# Altium PCB Batarey.PcbDoc
Units mm, origin at the board's own origin, x right, y up, seen from the top; angles counter-clockwise.
Board outline 285.25 x 105.25 mm, 2 copper layers (Top Layer, Bottom Layer); 38 components, 31 nets, 125 pads, 0 vias.
Unrouted connection lines stored in the file: 60.
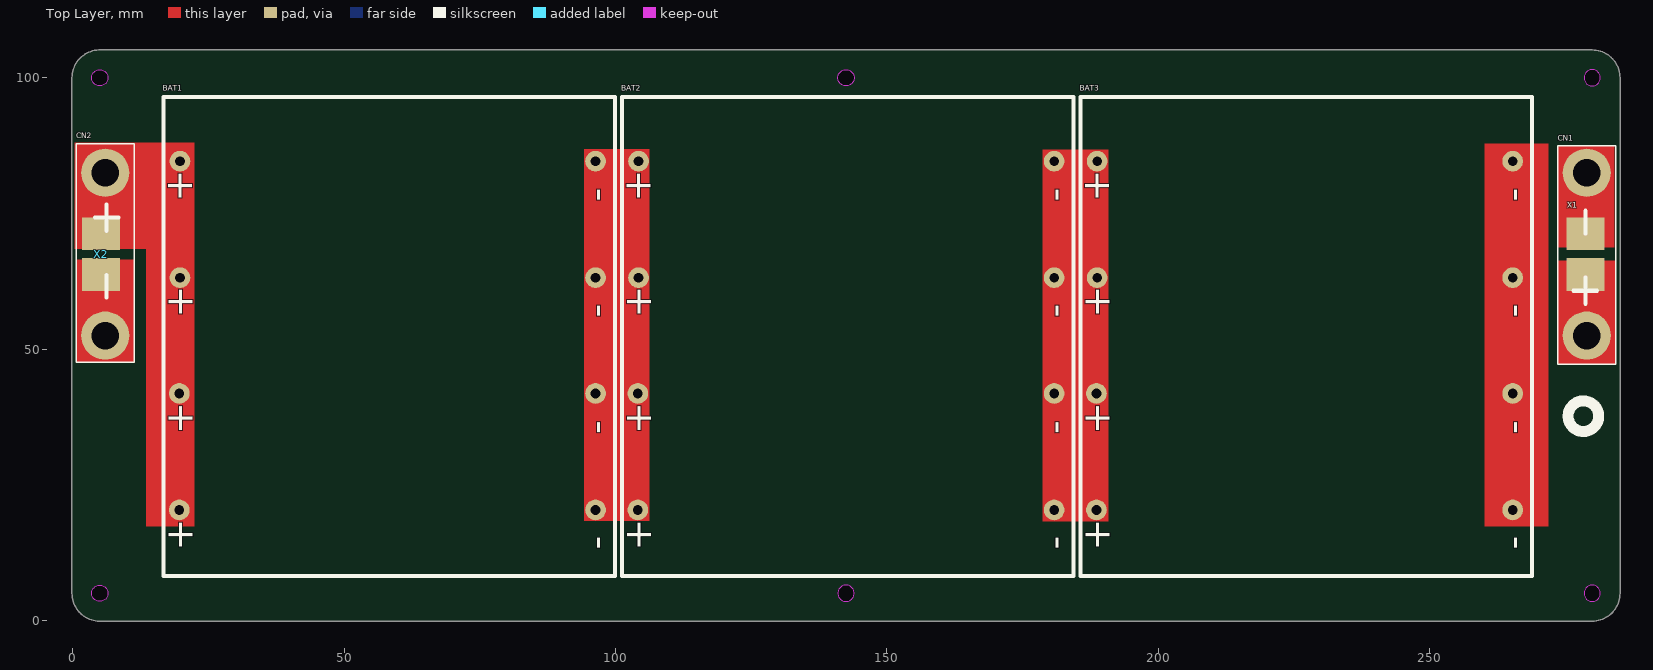
[diagram p0: Top Layer view]
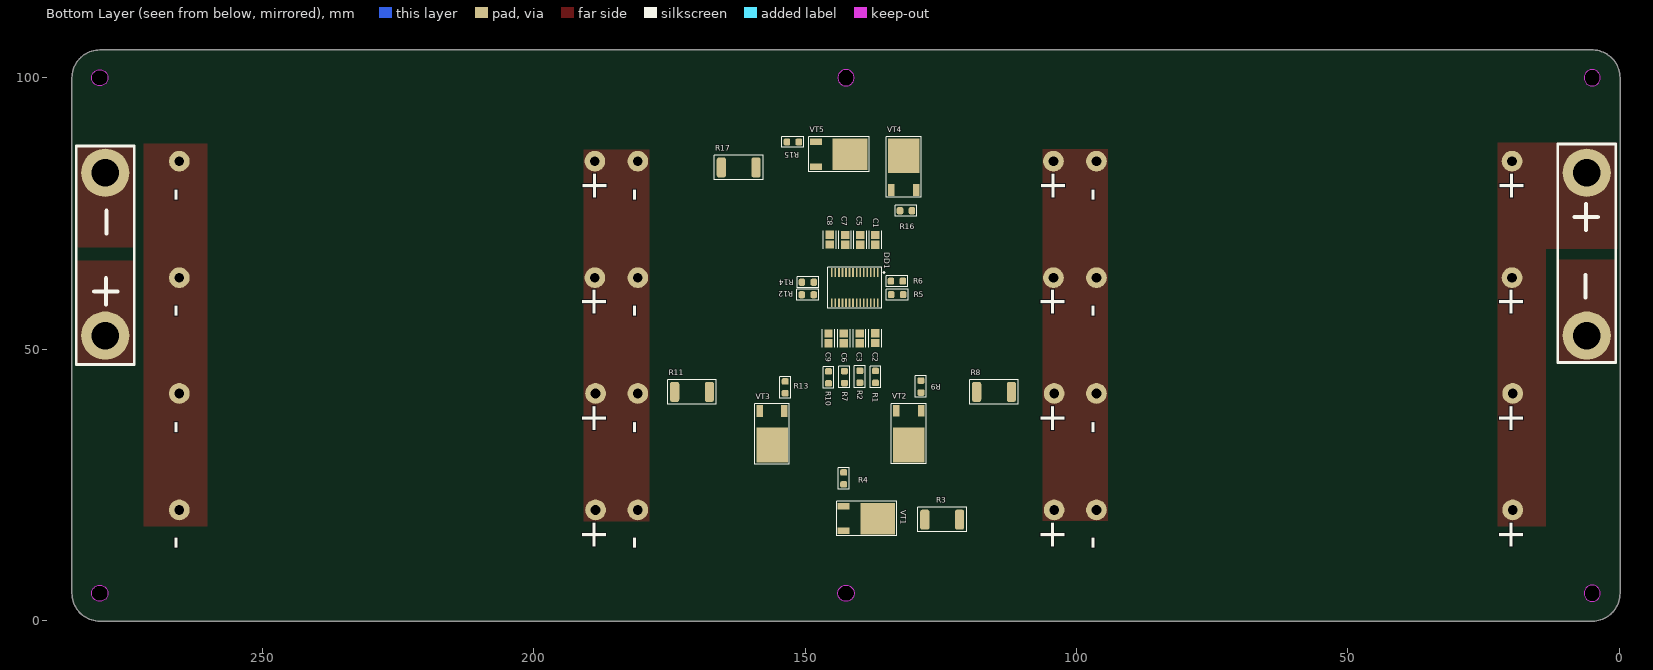
[diagram p1: Bottom Layer view, seen from below]

## Layer stack, top to bottom
Top Solder: solder mask 0.0102, Solder Resist, Dk 3.5
Top Layer: signal copper 0.0356
Dielectric 1: dielectric 0.32, FR-4, Dk 4.8
Bottom Layer: signal copper 0.0356
Bottom Solder: solder mask 0.0102, Solder Resist, Dk 3.5

## Board outline
-0.127,5 -0.127,5.001 -0.127,100 cw(c5,100) 4.822,105.124 cw(c4.85,105) 4.85,105.127 280,105.127 cw(c280,105) 280.003,105.127 cw(c280,100) 285.127,100 285.127,5 cw(c280,5) 280.03,-0.127 cw(c280.025,-0.001) 280.025,-0.127 4.95,-0.127 cw(c4.95,0) 4.94,-0.127 cw(c5,5)
cut-out: 278.5,5 ccw(c280,5) 280,3.5 ccw(c280,5) 281.5,5 ccw(c280,5) 280,6.5 ccw(c280,5)
cut-out: 278.5,100 ccw(c280,100) 280,98.5 ccw(c280,100) 281.5,100 ccw(c280,100) 280,101.5 ccw(c280,100)
cut-out: 142.5,98.5 cw(c142.5,100) 141,100 cw(c142.5,100) 142.5,101.5 cw(c142.5,100) 144,100 cw(c142.5,100)
cut-out: 141,5 ccw(c142.5,5) 142.5,3.5 ccw(c142.5,5) 144,5 ccw(c142.5,5) 142.5,6.5 ccw(c142.5,5)
cut-out: 5,3.5 cw(c5,5) 3.5,5 cw(c5,5) 5,6.5 cw(c5,5) 6.5,5 cw(c5,5)
cut-out: 5,98.5 cw(c5,100) 3.5,100 cw(c5,100) 5,101.5 cw(c5,100) 6.5,100 cw(c5,100)

## Design rules (kind name [scope] priority, off if disabled: settings)
Clearance [All] p1: gap=0.254 ignorepadtopadclearanceinfootprint=TRUE
ComponentClearance [All] p1: gap=0.254 collisioncheckmode=3 verticalgap=-10 showdistances=FALSE
PlaneClearance PlaneClearance_1 [All] p1: clearance=1
PolygonConnect PolygonConnect_1 [All] p1: connectstyle=Direct reliefconductorwidth=0.254 reliefentries=4 polygonreliefangle="90 Angle" airgapwidth=0.254
RoutingVias [All] p1: holewidth=0.4 width=0.8 viastyle="Through Hole" minholewidth=0.4 minwidth=0.8 maxholewidth=4 maxwidth=6
SolderMaskExpansion [All] p1: expansion=0.102 istentingtop=FALSE
Width [All] p1: maxlimit=12.7 minlimit=0.254 preferedwidth=1 bottomlayer_prefwidth=0.508 minimp=50.000000 maximp=50.000000 favimp=50.000000
28 further rules are at their usual default settings.

## Components (designator, comment, footprint, x,y, rotation, side; value= is the part's Value field where it differs from the comment)
BAT1 "21700_Bat" 21700_BAT 58,52.5 r90 top locked
BAT2 "21700_Bat" 21700_BAT 142.5,52.5 r90 top locked
BAT3 "21700_Bat" 21700_BAT 227,52.5 r90 top locked
C1 "C0805C224K5RACTU" FP-C0805C-DN-IPC_A 137.075,70.125 r270 bottom value="0.22 μF"
C2 "C0805C224K5RACTU" FP-C0805C-DN-IPC_A 137.1,52.025 r270 bottom value="0.22 μF"
C3 "C0805C224K5RACTU" FP-C0805C-DN-IPC_A 140,52 r270 bottom value="0.22 μF"
C5 "C0805C224K5RACTU" FP-C0805C-DN-IPC_A 139.875,70.125 r270 bottom value="0.22 μF"
C6 "C0805C224K5RACTU" FP-C0805C-DN-IPC_A 142.875,51.975 r270 bottom value="0.22 μF"
C7 "C0805C224K5RACTU" FP-C0805C-DN-IPC_A 142.675,70.15 r270 bottom value="0.22 μF"
C8 "C0805C224K5RACTU" FP-C0805C-DN-IPC_A 145.5,70.175 r270 bottom value="0.22 μF"
C9 "C0805C224K5RACTU" FP-C0805C-DN-IPC_A 145.725,52 r270 bottom value="0.22 μF"
CN1 "BAT_CON" Batarey_connector 279,67.5 r90 top locked
CN2 "BAT_CON" Batarey_connector 6,67.5 r270 top locked
DD1 "BM3451" TSSOP-28 140.875,61.325 r270 bottom
R1 "*" R-0805 137.075,44.875 r270 bottom
R2 "*" R-0805 139.95,44.9 r270 bottom
R3 "*" R-2512 124.775,18.575 r180 bottom
R4 "*" R-0805 142.925,26.175 r270 bottom
R5 "*" R-0805 133.075,60.05 r180 bottom
R6 "*" R-0805 133.125,62.525 r180 bottom
R7 "*" R-0805 142.8,44.85 r270 bottom
R8 "*" R-2512 115.225,42.125 r180 bottom
R9 "*" R-0805 128.7,43.1 r270 bottom
R10 "*" R-0805 145.725,44.8 r270 bottom
R11 "*" R-2512 170.875,42.125 r0 bottom
R12 "*" R-0805 149.55,60.025 r180 bottom
R13 "*" R-0805 153.7,42.95 r270 bottom
R14 "*" R-0805 149.525,62.325 r0 bottom
R15 "*" R-0805 152.3,88.175 r0 bottom
R16 "*" R-0805 131.45,75.5 r180 bottom
R17 "*" R-2512 162.275,83.475 r0 bottom
VT1 "MOSFET-N-GDS" TO-220-5 138.725,18.775 r270 bottom
VT2 "MOSFET-N-GDS" TO-220-5 130.925,34.45 r0 bottom
VT3 "MOSFET-N-GDS" TO-220-5 156.125,34.425 r0 bottom
VT4 "MOSFET-N-GDS" TO-220-5 131.875,83.525 r180 bottom
VT5 "MOSFET-N-GDS" TO-220-5 143.85,85.925 r270 bottom
X1 "XT60-F" "XT60-F AMASS" 279,67.5 r270 top locked
X2 "XT60-F" "XT60-F AMASS" 5,67.5 r90 top locked

## Footprints (in the part's own frame and the unit in brackets; to place one, negate y for a bottom-side part, rotate by r counter-clockwise, add the part's x,y. Pads: shape width x height; smd on the part's side, far side on the other; paste and mask are expansions set on the pad)
21700_BAT [mil]
  round 150 hole 70: 1(-1265,1510) 2(-1265,-1510) 3(-420,1510) 4(-420,-1510) 5(420,1505) 6(420,-1510) 7(1265,1505) 8(1265,-1510)
  silkscreen extent -1745,-1650 1730,1625, body extent -1732,-1634 1732,1634, height 858
Batarey_connector [mm]
  round 8.89 hole 5.08: 1(-15,0) 2(15,0)
  silkscreen extent -20.32,-5.33 19.94,5.33
FP-C0805C-DN-IPC_A [mm]
  rect 1.505x1.556 smd paste+0 mask+0: 1(-0.901,0) 2(0.901,0)
  silkscreen extent -1.65,-1.18 1.65,1.18, body extent -1,-0.63 1,0.63, height 0.88
R-0805 [mm] "Chip Resistor, 2-Leads, Body 2,00x1,25mm, IPC Medium Density"
  rrect50% 1.2x1.3 smd: 1(-1.1,0) 2(1.1,0)
  silkscreen extent -2,-1 2,1, body extent -1,-0.62 1,0.63, height 0.6
R-2512 [mm]
  rrect50% 1.7x3.7 smd: 1(-3.2,0) 2(3.2,0)
  silkscreen extent -4.5,-2.25 4.5,2.25, body extent -3.16,-1.6 3.16,1.6, height 0.62
TO-220-5 [mm]
  rect 1.2x2.2 smd: 1(-2.28,-4.2) 3(2.28,-4.2)
  rect 5.8x6.4 smd: 2(0,2.1)
  silkscreen extent -3.2,-5.5 3.2,5.6, body extent -3.29,-4.77 3.29,4.93, height 2.3
TSSOP-28 [mm]
  rect 1.6x0.3 smd: 1(-2.8,4.225) 2(-2.8,3.575) 3(-2.8,2.925) 4(-2.8,2.275) 5(-2.8,1.625) 6(-2.8,0.975) 7(-2.8,0.325) 8(-2.8,-0.325) 9(-2.8,-0.975) 10(-2.8,-1.625) 11(-2.8,-2.275) 12(-2.8,-2.925) 13(-2.8,-3.575) 14(-2.8,-4.225) 15(2.8,-4.225) 16(2.8,-3.575) 17(2.8,-2.925) 18(2.8,-2.275) 19(2.8,-1.625) 20(2.8,-0.975) 21(2.8,-0.325) 22(2.8,0.325) 23(2.8,0.975) 24(2.8,1.625) 25(2.8,2.275) 26(2.8,2.925) 27(2.8,3.575) 28(2.8,4.225)
  silkscreen extent -3.8,-4.95 3.8,5.49, body extent -3.2,-4.85 3.2,4.85, height 1.17
"XT60-F AMASS" [mm] "Вилка; питания DC; XT60; \"мама\"; PIN: 2; на провод; под пайку; 30А"
  rect 6x7 smd: 1(-3.75,-0.25) 2(3.75,-0.25)
  body extent -7.75,-0.75 7.75,20.15, height 6.25

## Part data
C1 C2 C3 C5 C6 C7 C8 C9: library part CMP-1036-04552-2, "CAP CER 0.22UF 50V X7R 0805", Capacitance="0.22 μF", Manufacturer=KEMET, Package=C0805C-DN, Temperature="-55°C to +125°C", Temperature Characteristic=X7R, Temperature Coefficient=30ppm/°C, Temperature Range High=+125°C, Temperature Range Low=-55°C, Tolerance=0.1, Voltage Rating="50 V", Automotive=No, Category=Cap, ComponentLink2Description=Datasheet, ComponentLink2URL=https://content.kemet.com/datasheets/KEM_C1003_C0G_SMD.pdf, Device Class L1="Passive Components", Device Class L2=Capacitors, Device Class L3="Ceramic Capacitors", Digikey Description="CAP CER 0.22UF 50V X7R 0805", Height=0.88mm, Ipc Land Pattern Name=CAPC200125X78, Lead Free=Yes, Manufacturer Part Number=C0805C224K5RACTU, Material=Ceramic, Mouser Description="CAP CER 0.22UF 50V X7R 0805", Octopart=https://octopart.com/c0805c224k5ractu-kemet-144670, RoHS=TRUE
CN1 CN2: "Batarey_connection"
R1 R2 R4 R5 R6 R7 R9 R10 R12 R13 R14 R15 R16: library part R0805, "Резистор SMD", Package=R-0805, Tolerance=5%, ComponentDescription="Резистор SMD, R-0805, *Ом, 5%", ComponentType="Резистор SMD"
R3 R8 R11 R17: library part R2512, "Резистор SMD", Package=R-2512, Tolerance=5%, ComponentDescription="Резистор SMD, R-2512, *Ом, 5%", ComponentType="Резистор SMD"
X1 X2: "Разъем", ComponentDescription="Разъём, XT60-F", ComponentTypе=Разъём

## Nets (pads, with @x,y where several pads share a name; then routed paths per layer and width w, separated by ;. In a path a pad name is that pad's centre, name@x,y a point inside that pad or via, vN(x,y) a via of type N, cw(c..) or ccw(c..) an arc to the next point about the centre after c; other vN are vias at no path point)
GND: BAT3.2 BAT3.4 BAT3.6 BAT3.8 C1.1 C2.2 C3.2 C5.1 C6.2 C7.1 C8.1 C9.2 DD1.16 DD1.17 DD1.19 DD1.21 R12.1 R17.2 VT3.3
NetBAT1_2: BAT1.2 BAT1.4 BAT1.6 BAT1.8 BAT2.1 BAT2.3 BAT2.5 BAT2.7 R7.2 R8.2 VT1.3
NetBAT2_2: BAT2.2 BAT2.4 BAT2.6 BAT2.8 BAT3.1 BAT3.3 BAT3.5 BAT3.7 R10.2 R11.2 VT2.3
NetC1_2: C1.2 DD1.4
NetC2_1: C2.1 DD1.28 R1.1 R5.2 R6.2
NetC3_1: C3.1 DD1.27 R2.1
NetC5_2: C5.2 DD1.5
NetC6_1: C6.1 DD1.25 R7.1
NetC7_2: C7.2 DD1.6
NetC8_2: C8.2 DD1.7
NetC9_1: C9.1 DD1.23 R10.1
NetDD1_2: DD1.2 R6.1
NetDD1_3: DD1.3 R5.1
NetDD1_9: DD1.9 R12.2
NetDD1_10: DD1.10 R14.1
NetDD1_11: DD1.11 R16.1 VT4.1
NetDD1_12: DD1.12 R15.2
NetDD1_14: DD1.14 R17.1 VT5.3
NetDD1_22: DD1.22 R13.1
NetDD1_24: DD1.24 R9.1
NetDD1_26: DD1.26 R4.1
NetR3_1: R3.1 VT1.2
NetR4_2: R4.2 VT1.1
NetR8_1: R8.1 VT2.2
NetR9_2: R9.2 VT2.1
NetR11_1: R11.1 VT3.2
NetR13_2: R13.2 VT3.1
NetR15_1: R15.1 VT5.1
NetVT4_2: VT4.2 VT5.2
P+: BAT1.1 BAT1.3 BAT1.5 BAT1.7 CN1.1 CN2.1 R1.2 R2.2 R3.2 X1.2 X2.2
P-: CN1.2 CN2.2 R14.2 R16.2 VT4.3 X1.1 X2.1
pads on no net: DD1.1 DD1.8 DD1.13 DD1.15 DD1.18 DD1.20

## Other copper
Top Layer:
  rectangle net P-: 0.625,47.55 11.375,66.55
  rectangle net P+: 273.625,47.225 284.3,66.375
  rectangle net P-: 273.7,68.7 284.15,87.65
  rectangle net P+: 0.325,68.5 22.425,88.075
  rectangle net GND: 260.2,17.35 271.95,87.925
  rectangle net P+: 13.55,17.35 22.425,86.825
  rectangle net NetBAT1_2: 94.225,18.35 106.3,86.9
  rectangle net NetBAT2_2: 178.675,18.2 190.9,86.8

## Silkscreen, mask and mechanical layers (free items; w line width, h text height)
Top Overlay:
  circle w2: c278.375,37.65 r2.817
Mechanical 1:
  circle w0.254: c142.5,100 r1.5
  circle w0.254: c142.5,5 r1.5
  circle w0.254: c5,5 r1.5
  circle w0.254: c5,100 r1.5
  circle w0.254: c280,100 r1.5
  circle w0.254: c280,5 r1.5
  lines w0.254: 4.85,105 280,105 cw(c280,100) 285,100 285,5 cw(c280,5) 280,0 ; 4.95,0 280.025,0 ; 5,0 cw(c5,5) 0,5 0,100 cw(c5,100) 5,105

## Text inside footprints (layer, text, board x,y; h text height)
BAT1: Top Overlay "-" at 98.893,77.138 h5.08 r90; Top Overlay "-" at 98.893,55.802 h5.08 r90; Top Overlay "-" at 98.893,34.339 h5.08 r90; Top Overlay "-" at 98.893,13.003 h5.08 r90; Top Overlay "+" at 22.016,77.138 h5.08 r90; Top Overlay "+" at 22.143,55.802 h5.08 r90; Top Overlay "+" at 22.143,34.339 h5.08 r90; Top Overlay "+" at 22.143,12.876 h5.08 r90; Bottom Overlay "-" at 98.893,13.003 h5.08 r90; Bottom Overlay "-" at 98.893,34.339 h5.08 r90; Bottom Overlay "-" at 98.893,77.138 h5.08 r90; Bottom Overlay "-" at 98.893,55.802 h5.08 r90; Bottom Overlay "+" at 22.016,77.138 h5.08 r90; Bottom Overlay "+" at 22.143,55.802 h5.08 r90; Bottom Overlay "+" at 22.143,12.876 h5.08 r90; Bottom Overlay "+" at 22.143,34.339 h5.08 r90
BAT2: Top Overlay "+" at 106.643,12.876 h5.08 r90; Top Overlay "-" at 183.393,77.138 h5.08 r90; Top Overlay "-" at 183.393,55.802 h5.08 r90; Top Overlay "-" at 183.393,34.339 h5.08 r90; Top Overlay "-" at 183.393,13.003 h5.08 r90; Top Overlay "+" at 106.516,77.138 h5.08 r90; Top Overlay "+" at 106.643,55.802 h5.08 r90; Top Overlay "+" at 106.643,34.339 h5.08 r90; Bottom Overlay "-" at 183.393,13.003 h5.08 r90; Bottom Overlay "-" at 183.393,34.339 h5.08 r90; Bottom Overlay "-" at 183.393,77.138 h5.08 r90; Bottom Overlay "-" at 183.393,55.802 h5.08 r90; Bottom Overlay "+" at 106.516,77.138 h5.08 r90; Bottom Overlay "+" at 106.643,55.802 h5.08 r90; Bottom Overlay "+" at 106.643,12.876 h5.08 r90; Bottom Overlay "+" at 106.643,34.339 h5.08 r90
BAT3: Top Overlay "+" at 191.143,12.876 h5.08 r90; Top Overlay "+" at 191.143,34.339 h5.08 r90; Top Overlay "+" at 191.143,55.802 h5.08 r90; Top Overlay "+" at 191.016,77.138 h5.08 r90; Top Overlay "-" at 267.893,13.003 h5.08 r90; Top Overlay "-" at 267.893,34.339 h5.08 r90; Top Overlay "-" at 267.893,55.802 h5.08 r90; Top Overlay "-" at 267.893,77.138 h5.08 r90; Bottom Overlay "+" at 191.143,34.339 h5.08 r90; Bottom Overlay "+" at 191.143,12.876 h5.08 r90; Bottom Overlay "+" at 191.143,55.802 h5.08 r90; Bottom Overlay "+" at 191.016,77.138 h5.08 r90; Bottom Overlay "-" at 267.893,55.802 h5.08 r90; Bottom Overlay "-" at 267.893,77.138 h5.08 r90; Bottom Overlay "-" at 267.893,34.339 h5.08 r90; Bottom Overlay "-" at 267.893,13.003 h5.08 r90